# EAGLE board registers_manual2 (EAGLE 9.5.2)
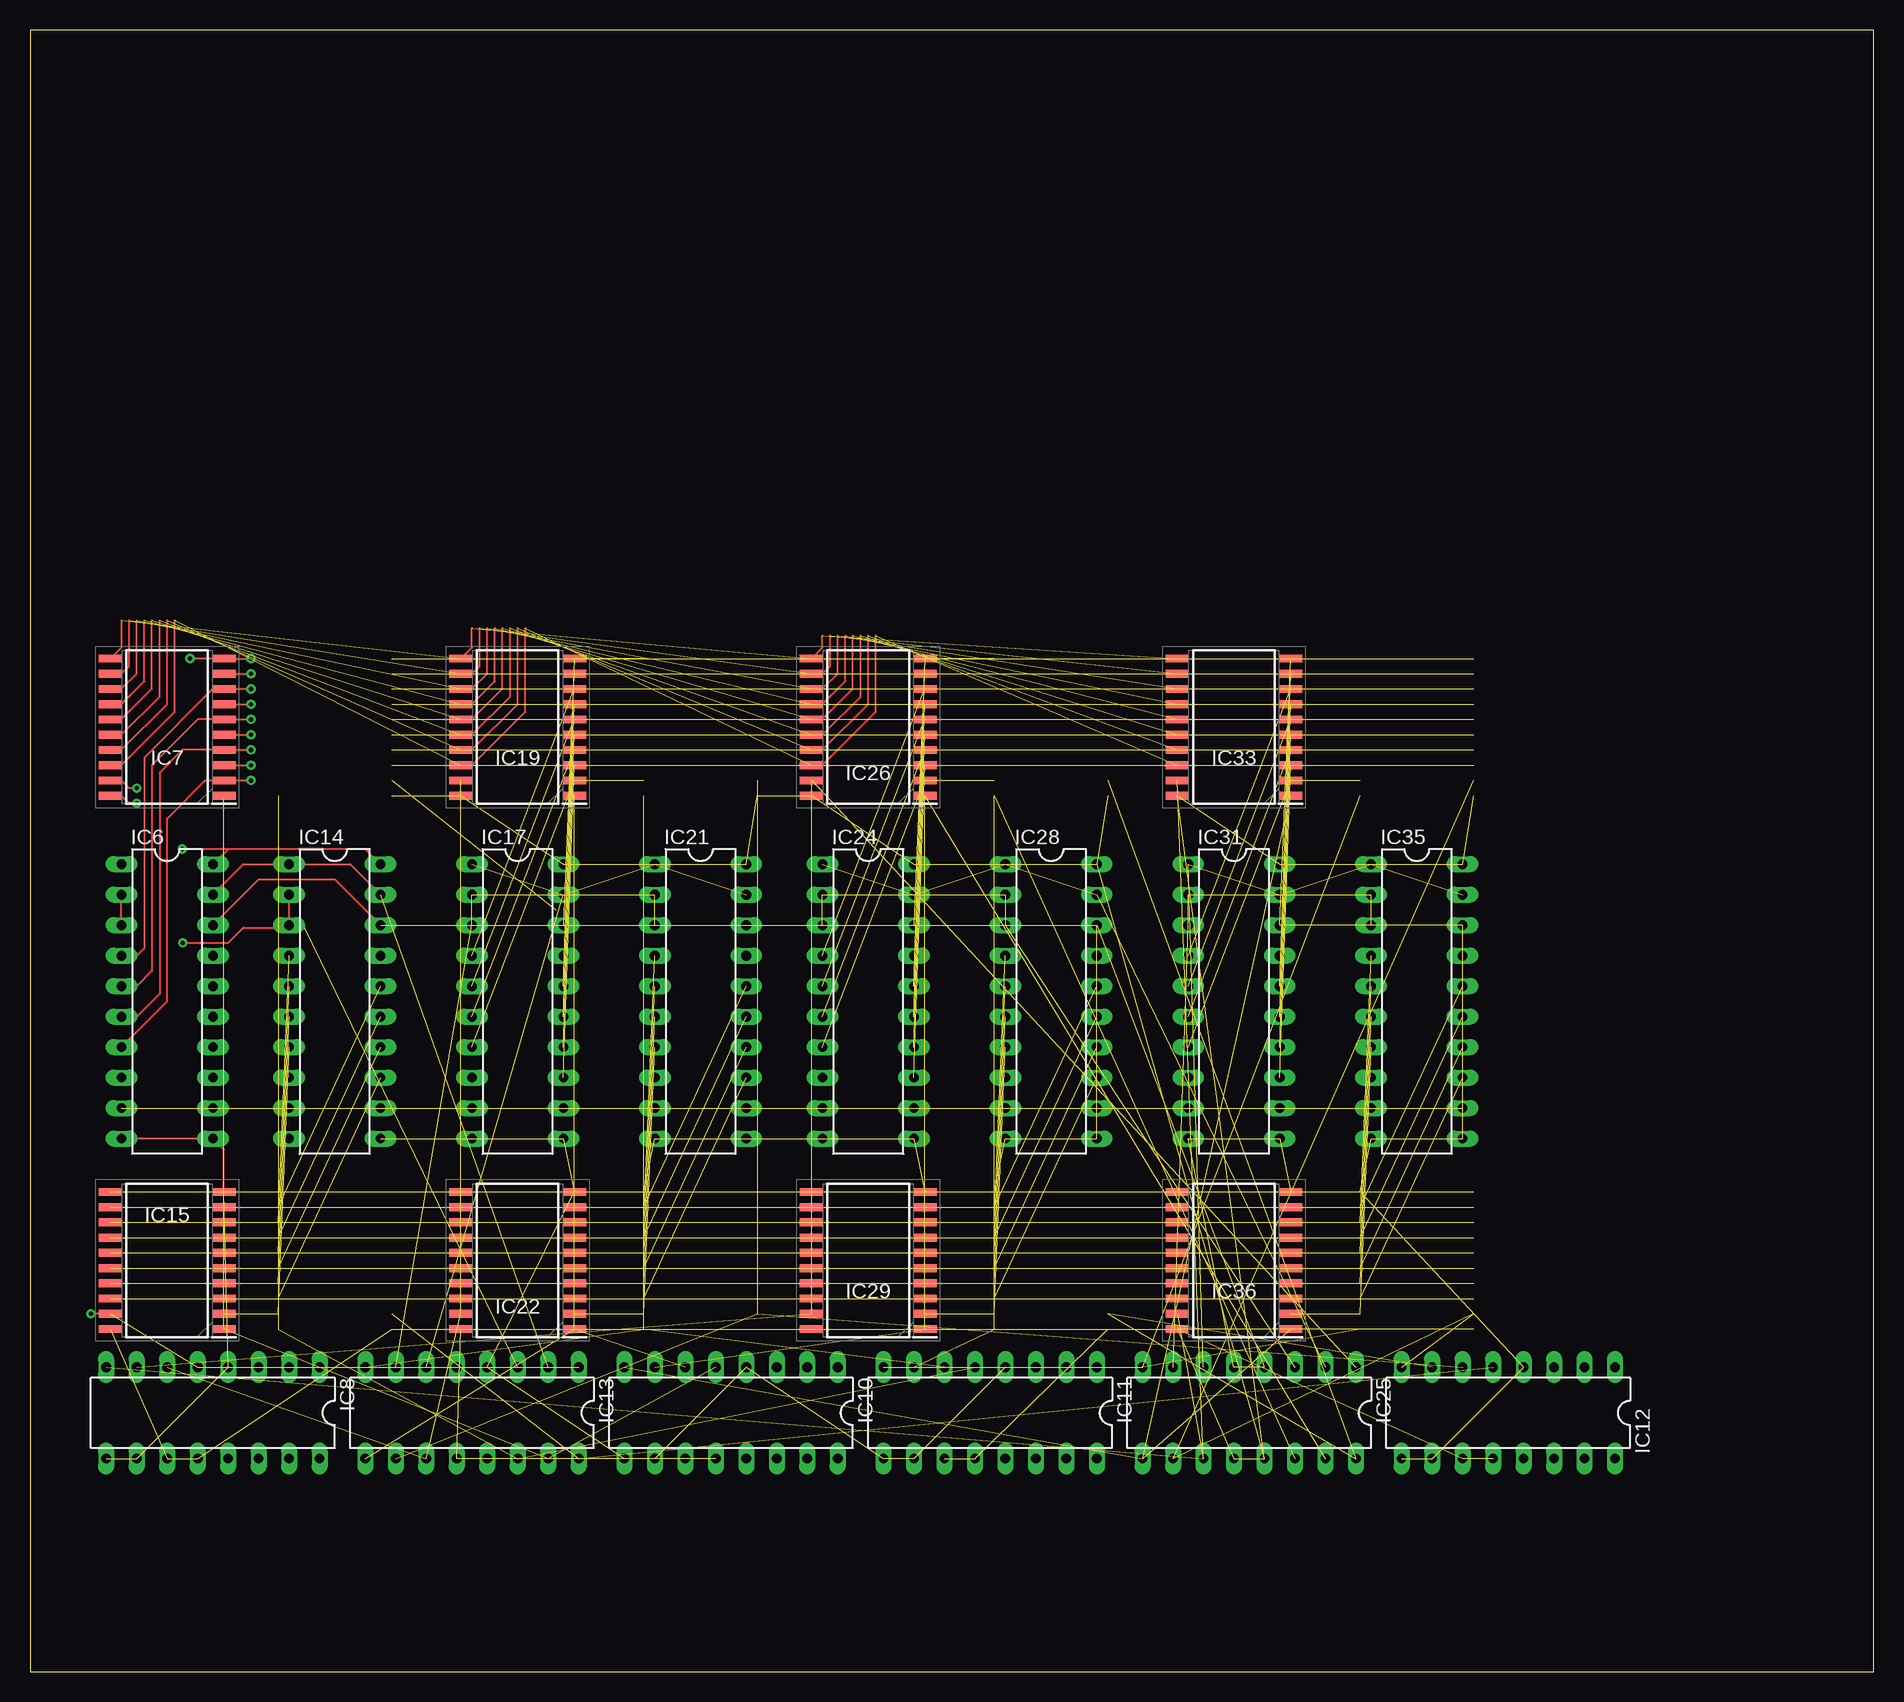
[diagram p0: board, top side]
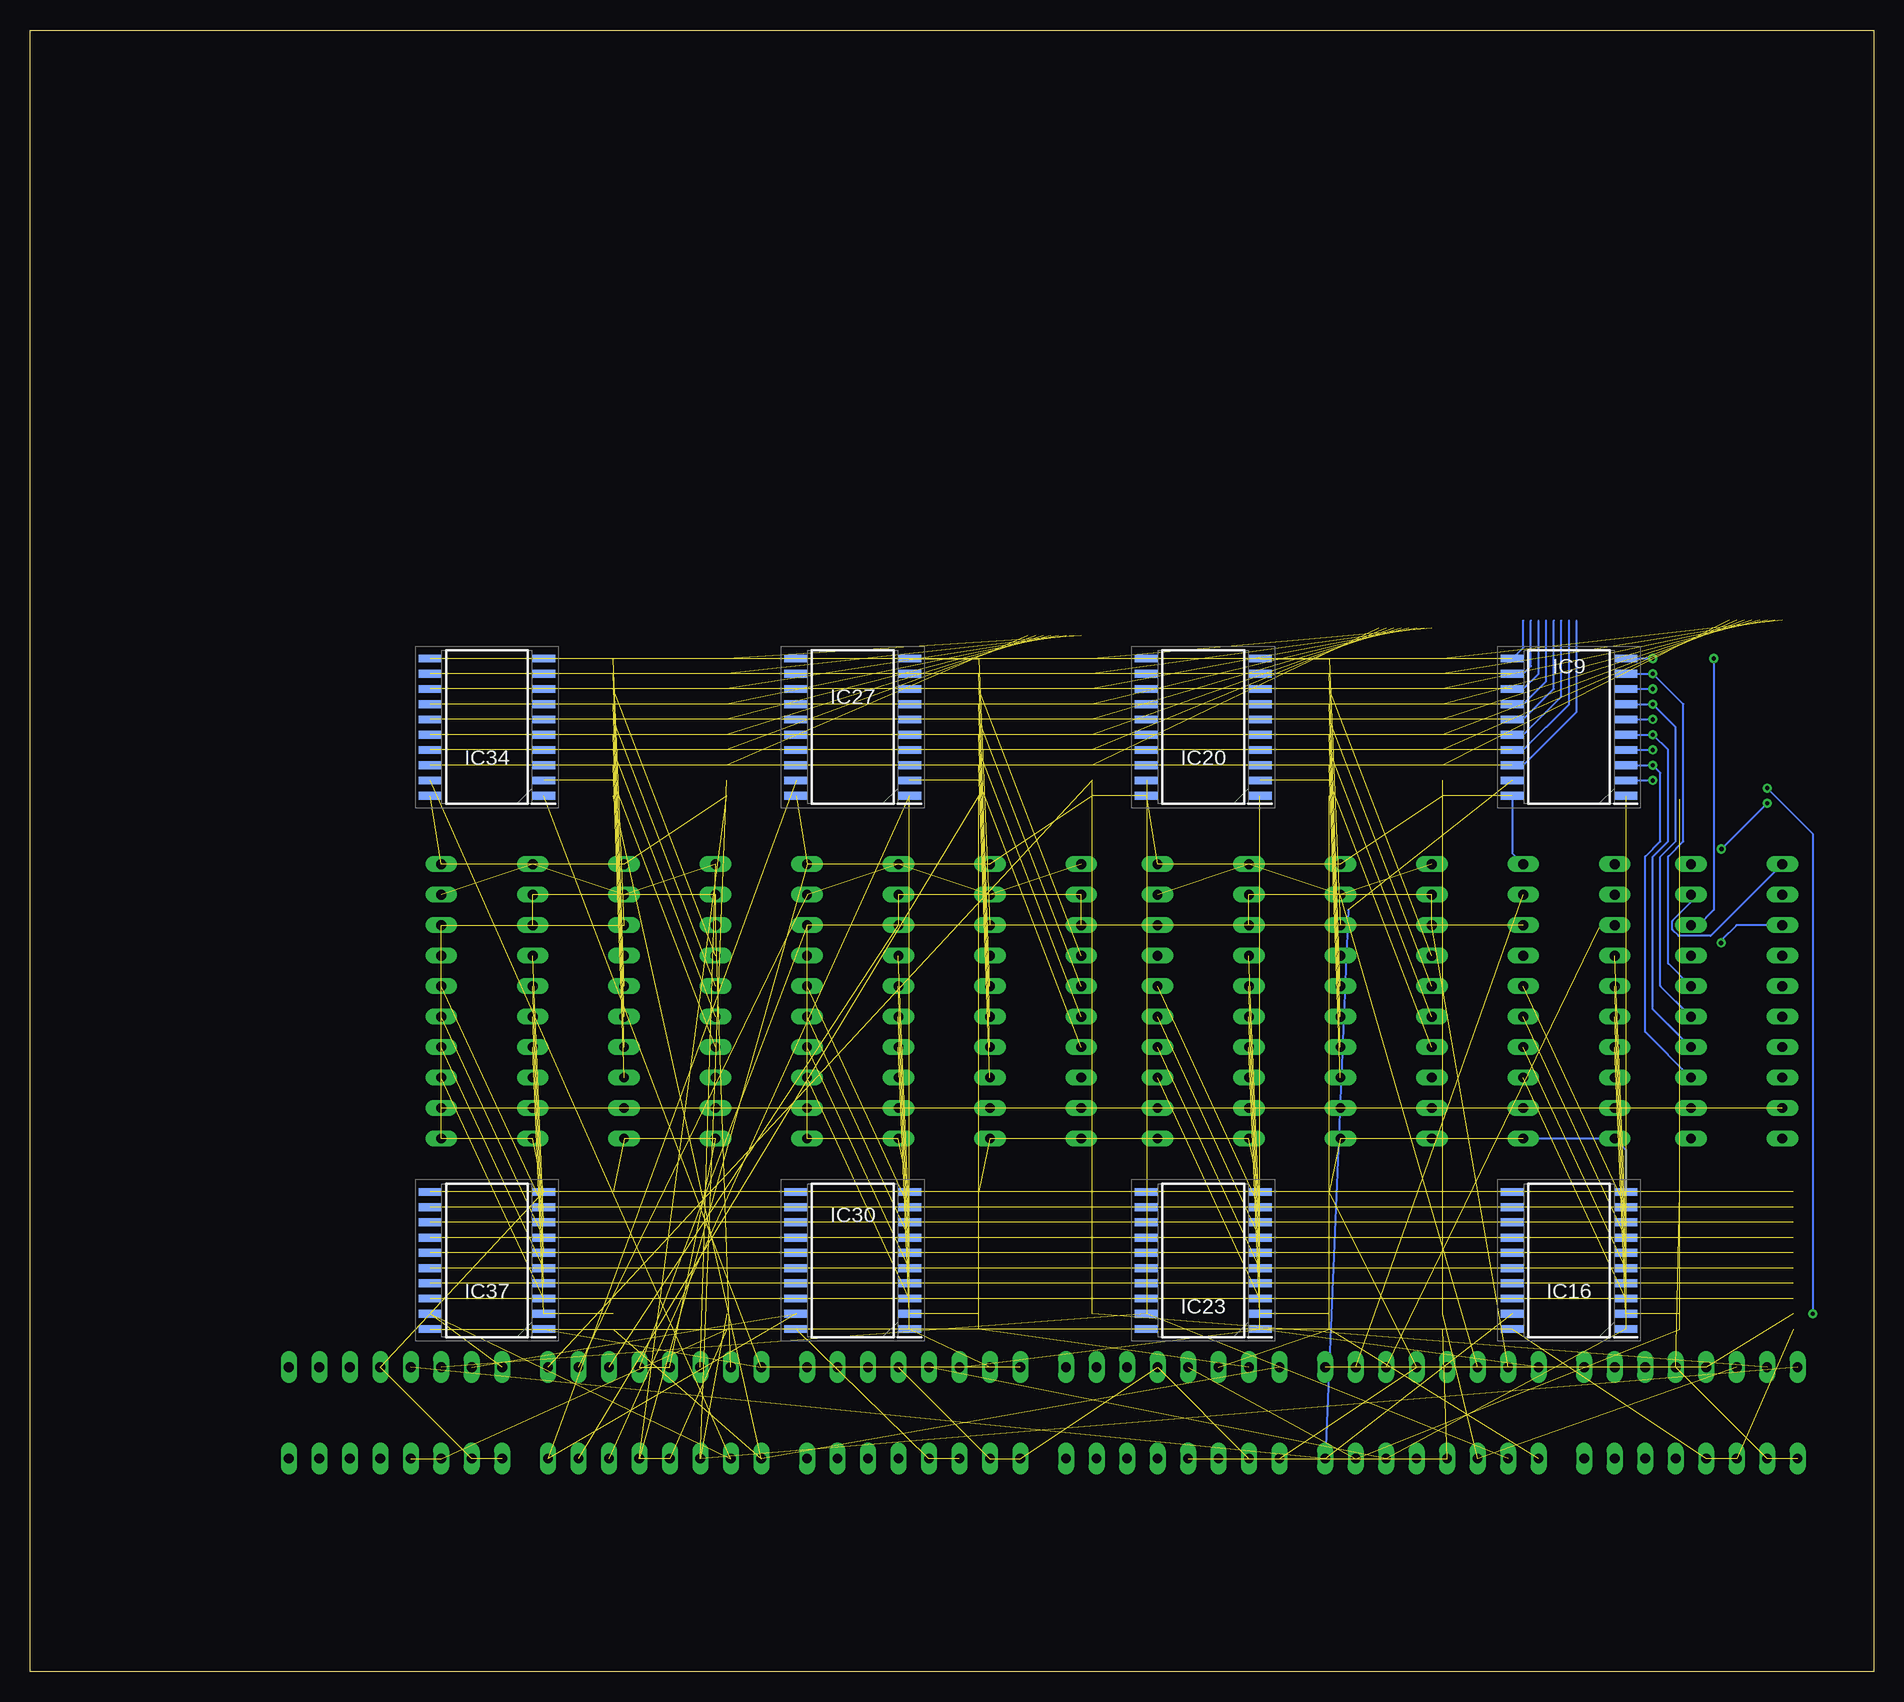
[diagram p1: board, bottom side, seen from below]

Size 153.65 x 136.83 mm. Coordinates in mm from the lower left corner, seen from the top.
Outline: 0,0 153.65,0 153.65,136.83 0,136.83 0,0
Copper layers (1*16): Top 0.035mm / dielectric 1.5mm / Bottom 0.035mm
Design rules "default *": minimum track width 6mil, minimum drill 0.35mm, track to track 6mil, track to pad 6mil, pad to pad 6mil, via to via 6mil, smd to smd 6mil, copper to edge 40mil, drill to drill 6mil, minimum pad ring 10mil, minimum via ring 8mil, stop-mask expansion 4mil, vias tented up to drill 0mil, thermal gap 10mil

## Footprints (pad centres in the part's own frame; a part is rotated, then mirrored left to right if it is on the bottom)
DIL20 = drill 0.813 long: 1 -11.43,-3.81; 2 -8.89,-3.81; 3 -6.35,-3.81; 4 -3.81,-3.81; 5 -1.27,-3.81; 6 1.27,-3.81; 7 3.81,-3.81; 8 6.35,-3.81; 9 8.89,-3.81; 10 11.43,-3.81; 11 11.43,3.81; 12 8.89,3.81; 13 6.35,3.81; 14 3.81,3.81; 15 1.27,3.81; 16 -1.27,3.81; 17 -3.81,3.81; 18 -6.35,3.81; 19 -8.89,3.81; 20 -11.43,3.81
SOIC127P1030X265-20N = smd 1.95 x 0.65: 1 -4.725,5.715; 2 -4.725,4.445; 3 -4.725,3.175; 4 -4.725,1.905; 5 -4.725,0.635; 6 -4.725,-0.635; 7 -4.725,-1.905; 8 -4.725,-3.175; 9 -4.725,-4.445; 10 -4.725,-5.715; 11 4.725,-5.715; 12 4.725,-4.445; 13 4.725,-3.175; 14 4.725,-1.905; 15 4.725,-0.635; 16 4.725,0.635; 17 4.725,1.905; 18 4.725,3.175; 19 4.725,4.445; 20 4.725,5.715
DIL16 = drill 0.813 long: 1 -8.89,-3.81; 2 -6.35,-3.81; 3 -3.81,-3.81; 4 -1.27,-3.81; 5 1.27,-3.81; 6 3.81,-3.81; 7 6.35,-3.81; 8 8.89,-3.81; 9 8.89,3.81; 10 6.35,3.81; 11 3.81,3.81; 12 1.27,3.81; 13 -1.27,3.81; 14 -3.81,3.81; 15 -6.35,3.81; 16 -8.89,3.81

## Placement (x,y rotation side)
IC6  74HCT299N  [DIL20]  11.43,55.88 270 top
IC7  SN74CBT3345DW  [SOIC127P1030X265-20N]  11.43,78.74 180 top
IC8  74AC11138  [DIL16]  15.24,21.59 180 top
IC9  SN74CBT3345DW  [SOIC127P1030X265-20N]  25.4,78.74 180 bottom
IC10  74AC11238  [DIL16]  58.42,21.59 180 top
IC11  74AC11238  [DIL16]  80.01,21.59 180 top
IC12  74AC11138  [DIL16]  123.19,21.59 180 top
IC13  74AC11032  [DIL16]  36.83,21.59 180 top
IC14  74HCT299N  [DIL20]  25.4,55.88 270 top
IC15  SN74CBT3345DW  [SOIC127P1030X265-20N]  11.43,34.29 180 top
IC16  SN74CBT3345DW  [SOIC127P1030X265-20N]  25.4,34.29 180 bottom
IC17  74HCT299N  [DIL20]  40.64,55.88 270 top
IC19  SN74CBT3345DW  [SOIC127P1030X265-20N]  40.64,78.74 180 top
IC20  SN74CBT3345DW  [SOIC127P1030X265-20N]  55.88,78.74 180 bottom
IC21  74HCT299N  [DIL20]  55.88,55.88 270 top
IC22  SN74CBT3345DW  [SOIC127P1030X265-20N]  40.64,34.29 180 top
IC23  SN74CBT3345DW  [SOIC127P1030X265-20N]  55.88,34.29 180 bottom
IC24  74HCT299N  [DIL20]  69.85,55.88 270 top
IC25  74AC11032  [DIL16]  101.6,21.59 180 top
IC26  SN74CBT3345DW  [SOIC127P1030X265-20N]  69.85,78.74 180 top
IC27  SN74CBT3345DW  [SOIC127P1030X265-20N]  85.09,78.74 180 bottom
IC28  74HCT299N  [DIL20]  85.09,55.88 270 top
IC29  SN74CBT3345DW  [SOIC127P1030X265-20N]  69.85,34.29 180 top
IC30  SN74CBT3345DW  [SOIC127P1030X265-20N]  85.09,34.29 180 bottom
IC31  74HCT299N  [DIL20]  100.33,55.88 270 top
IC33  SN74CBT3345DW  [SOIC127P1030X265-20N]  100.33,78.74 180 top
IC34  SN74CBT3345DW  [SOIC127P1030X265-20N]  115.57,78.74 180 bottom
IC35  74HCT299N  [DIL20]  115.57,55.88 270 top
IC36  SN74CBT3345DW  [SOIC127P1030X265-20N]  100.33,34.29 180 top
IC37  SN74CBT3345DW  [SOIC127P1030X265-20N]  115.57,34.29 180 bottom

## Library data of the parts
IC6 IC14 IC17 IC21 IC24 IC28 IC31 IC35 = 74xx-eu
IC7 IC9 IC15 IC16 IC19 IC20 IC22 IC23 IC26 IC27 IC29 IC30 IC33 IC34 IC36 IC37 = SamacSys_Parts; DESCRIPTION: Texas Instruments SN74CBT3345DW, Bus Switch, 8 x 1:1, 4.5 5.5 V, 20-Pin SOIC; HEIGHT: 2.65mm; MANUFACTURER_NAME: Texas Instruments; MANUFACTURER_PART_NUMBER: SN74CBT3345DW
IC8 IC10-IC13 IC25 = 74ac-logic

## Nets
BUSA_BIT0: IC7.18 IC19.18 IC26.18 IC33.18
BUSA_BIT1: IC7.17 IC19.17 IC26.17 IC33.17
BUSA_BIT2: IC7.16 IC19.16 IC26.16 IC33.16
BUSA_BIT3: IC7.15 IC19.15 IC26.15 IC33.15
BUSA_BIT4: IC7.14 IC19.14 IC26.14 IC33.14
BUSA_BIT5: IC7.13 IC19.13 IC26.13 IC33.13
BUSA_BIT6: IC7.12 IC19.12 IC26.12 IC33.12
BUSA_BIT7: IC7.11 IC19.11 IC26.11 IC33.11
BUSA_BIT8: IC15.18 IC22.18 IC29.18 IC36.18
BUSA_BIT9: IC15.17 IC22.17 IC29.17 IC36.17
BUSA_BIT10: IC15.16 IC22.16 IC29.16 IC36.16
BUSA_BIT11: IC15.15 IC22.15 IC29.15 IC36.15
BUSA_BIT12: IC15.14 IC22.14 IC29.14 IC36.14
BUSA_BIT13: IC15.13 IC22.13 IC29.13 IC36.13
BUSA_BIT14: IC15.12 IC22.12 IC29.12 IC36.12
BUSA_BIT15: IC15.11 IC22.11 IC29.11 IC36.11
BUSA_REGIN0: IC8.15
BUSA_REGIN1: IC8.14
BUSA_REGIN2: IC8.13
BUSA_REGOUT0: IC10.15
BUSA_REGOUT1: IC10.14
BUSA_REGOUT2: IC10.13
BUSB_BIT0: IC9.18 IC20.18 IC27.18 IC34.18
BUSB_BIT1: IC9.17 IC20.17 IC27.17 IC34.17
BUSB_BIT2: IC9.16 IC20.16 IC27.16 IC34.16
BUSB_BIT3: IC9.15 IC20.15 IC27.15 IC34.15
BUSB_BIT4: IC9.14 IC20.14 IC27.14 IC34.14
BUSB_BIT5: IC9.13 IC20.13 IC27.13 IC34.13
BUSB_BIT6: IC9.12 IC20.12 IC27.12 IC34.12
BUSB_BIT7: IC9.11 IC20.11 IC27.11 IC34.11
BUSB_BIT8: IC16.18 IC23.18 IC30.18 IC37.18
BUSB_BIT9: IC16.17 IC23.17 IC30.17 IC37.17
BUSB_BIT10: IC16.16 IC23.16 IC30.16 IC37.16
BUSB_BIT11: IC16.15 IC23.15 IC30.15 IC37.15
BUSB_BIT12: IC16.14 IC23.14 IC30.14 IC37.14
BUSB_BIT13: IC16.13 IC23.13 IC30.13 IC37.13
BUSB_BIT14: IC16.12 IC23.12 IC30.12 IC37.12
BUSB_BIT15: IC16.11 IC23.11 IC30.11 IC37.11
BUSB_REGIN0: IC12.15
BUSB_REGIN1: IC12.14
BUSB_REGIN2: IC12.13
BUSB_REGOUT0: IC11.15
BUSB_REGOUT1: IC11.14
BUSB_REGOUT2: IC11.13
CLK: IC6.12 IC14.12 IC17.12 IC21.12 IC24.12 IC28.12 IC31.12 IC35.12
GND: IC6.10 IC6.11 IC6.18 IC7.10 IC8.4 IC8.9 IC8.10 IC9.10 IC10.4 IC10.9 IC10.10 IC11.4 IC11.9 IC11.10 IC12.4 IC12.9 IC12.10 IC13.4 IC13.5 IC14.10 IC14.11 IC14.18 IC15.10 IC16.10 IC17.10 IC17.11 IC17.18 IC19.10 IC20.10 IC21.10 IC21.11 IC21.18 IC22.10 IC23.10 IC24.10 IC24.11 IC24.18 IC25.4 IC25.5 IC26.10 IC27.10 IC28.10 IC28.11 IC28.18 IC29.10 IC30.10 IC31.10 IC31.11 IC31.18 IC33.10 IC34.10 IC35.10 IC35.11 IC35.18 IC36.10 IC37.10
N$8: IC6.7 IC7.2 IC9.2
N$10: IC7.19 IC8.5 IC13.1 IC15.19
N$18: IC6.13 IC7.3 IC9.3
N$19: IC6.2 IC6.3 IC13.3 IC14.2 IC14.3
N$20: IC6.6 IC7.4 IC9.4
N$21: IC6.1 IC6.19 IC13.2 IC14.1 IC14.19
N$22: IC14.7 IC15.2 IC16.2
N$23: IC14.13 IC15.3 IC16.3
N$24: IC14.6 IC15.4 IC16.4
N$25: IC8.7 IC25.1 IC26.19 IC29.19
N$26: IC6.14 IC7.5 IC9.5
N$27: IC6.5 IC7.6 IC9.6
N$28: IC14.14 IC15.5 IC16.5
N$29: IC14.5 IC15.6 IC16.6
N$30: IC14.15 IC15.7 IC16.7
N$31: IC14.4 IC15.8 IC16.8
N$32: IC9.1 IC11.5 IC13.14 IC16.1
N$33: IC9.19 IC12.5 IC13.16 IC16.19
N$34: IC7.1 IC10.5 IC13.15 IC15.1
N$35: IC14.16 IC15.9 IC16.9
N$41: IC6.15 IC7.7 IC9.7
N$43: IC6.4 IC7.8 IC9.8
N$44: IC13.6 IC17.1 IC17.19 IC21.1 IC21.19
N$45: IC17.7 IC19.2 IC20.2
N$46: IC17.13 IC19.3 IC20.3
N$47: IC6.16 IC7.9 IC9.9
N$48: IC17.6 IC19.4 IC20.4
N$49: IC17.14 IC19.5 IC20.5
N$50: IC17.5 IC19.6 IC20.6
N$51: IC17.15 IC19.7 IC20.7
N$52: IC17.4 IC19.8 IC20.8
N$53: IC17.16 IC19.9 IC20.9
N$54: IC13.7 IC17.2 IC17.3 IC21.2 IC21.3
N$56: IC21.7 IC22.2 IC23.2
N$57: IC21.13 IC22.3 IC23.3
N$58: IC21.6 IC22.4 IC23.4
N$59: IC21.14 IC22.5 IC23.5
N$60: IC21.5 IC22.6 IC23.6
N$61: IC21.15 IC22.7 IC23.7
N$62: IC21.4 IC22.8 IC23.8
N$63: IC21.16 IC22.9 IC23.9
N$69: IC24.1 IC24.19 IC25.2 IC28.1 IC28.19
N$70: IC24.7 IC26.2 IC27.2
N$71: IC24.13 IC26.3 IC27.3
N$72: IC24.6 IC26.4 IC27.4
N$73: IC24.14 IC26.5 IC27.5
N$74: IC24.5 IC26.6 IC27.6
N$75: IC24.15 IC26.7 IC27.7
N$76: IC24.4 IC26.8 IC27.8
N$77: IC24.16 IC26.9 IC27.9
N$78: IC24.2 IC24.3 IC25.3 IC28.2 IC28.3
N$80: IC28.7 IC29.2 IC30.2
N$81: IC28.13 IC29.3 IC30.3
N$82: IC28.6 IC29.4 IC30.4
N$83: IC28.14 IC29.5 IC30.5
N$84: IC28.5 IC29.6 IC30.6
N$85: IC28.15 IC29.7 IC30.7
N$86: IC28.4 IC29.8 IC30.8
N$87: IC28.16 IC29.9 IC30.9
N$93: IC25.6 IC31.1 IC31.19 IC35.1 IC35.19
N$94: IC31.7 IC33.2 IC34.2
N$95: IC31.13 IC33.3 IC34.3
N$96: IC31.6 IC33.4 IC34.4
N$97: IC31.14 IC33.5 IC34.5
N$98: IC31.5 IC33.6 IC34.6
N$99: IC31.15 IC33.7 IC34.7
N$100: IC31.4 IC33.8 IC34.8
N$101: IC31.16 IC33.9 IC34.9
N$102: IC25.7 IC31.2 IC31.3 IC35.2 IC35.3
N$104: IC35.7 IC36.2 IC37.2
N$105: IC35.13 IC36.3 IC37.3
N$106: IC35.6 IC36.4 IC37.4
N$107: IC35.14 IC36.5 IC37.5
N$108: IC35.5 IC36.6 IC37.6
N$109: IC35.15 IC36.7 IC37.7
N$110: IC35.4 IC36.8 IC37.8
N$111: IC35.16 IC36.9 IC37.9
N$112: IC8.6 IC13.11 IC19.19 IC22.19
N$113: IC10.6 IC13.9 IC19.1 IC22.1
N$114: IC12.6 IC13.10 IC20.19 IC23.19
N$115: IC11.6 IC13.8 IC20.1 IC23.1
N$117: IC10.7 IC25.15 IC26.1 IC29.1
N$118: IC12.7 IC25.16 IC27.19 IC30.19
N$119: IC11.7 IC25.14 IC27.1 IC30.1
N$120: IC11.8 IC25.8 IC34.1 IC37.1
N$121: IC12.8 IC25.10 IC34.19 IC37.19
N$122: IC8.8 IC25.11 IC33.19 IC36.19
N$123: IC10.8 IC25.9 IC33.1 IC36.1
STARTUP: IC6.9 IC14.9 IC17.9 IC21.9 IC24.9 IC28.9 IC31.9 IC35.9
VCC: IC6.20 IC7.20 IC8.11 IC8.12 IC9.20 IC10.11 IC10.12 IC11.11 IC11.12 IC12.11 IC12.12 IC13.12 IC13.13 IC14.20 IC15.20 IC16.20 IC17.20 IC19.20 IC20.20 IC21.20 IC22.20 IC23.20 IC24.20 IC25.12 IC25.13 IC26.20 IC27.20 IC28.20 IC29.20 IC30.20 IC31.20 IC33.20 IC34.20 IC35.20 IC36.20 IC37.20

## Tracks (layer width: path | path; a pad name or v marks a point on that pad's centre or on a via)
BUSA_BIT0  (3 unrouted)
  Top 0.152: IC7.18 7.62,75.56 12.06,80.01 12.06,87.63 | IC19.18 36.83,75.56 41.27,80.01 41.27,87 | IC26.18 66.04,75.56 70.48,80.01 70.48,86.36
BUSA_BIT1  (3 unrouted)
  Top 0.152: IC7.17 7.62,76.83 11.43,80.64 11.43,87.63 | IC19.17 36.83,76.83 40.64,80.64 40.64,87 | IC26.17 66.04,76.83 69.85,80.64 69.85,86.36
BUSA_BIT2  (3 unrouted)
  Top 0.152: IC7.16 7.62,78.11 10.79,81.28 10.79,87.63 | IC19.16 36.83,78.11 40.01,81.28 40.01,87 | IC26.16 66.04,78.11 69.22,81.28 69.22,86.36
BUSA_BIT3  (3 unrouted)
  Top 0.152: IC7.15 7.62,79.38 10.16,81.92 10.16,87.63 | IC19.15 36.83,79.38 39.37,81.92 39.37,87 | IC26.15 66.04,79.38 68.58,81.92 68.58,86.36
BUSA_BIT4  (3 unrouted)
  Top 0.152: IC7.14 7.62,80.64 9.53,82.55 9.53,87.63 | IC19.14 36.83,80.64 38.73,82.55 38.73,87 | IC26.14 66.04,80.64 67.94,82.55 67.94,86.36
BUSA_BIT5  (3 unrouted)
  Top 0.152: IC7.13 7.62,81.92 8.89,83.19 8.89,87.63 | IC19.13 36.83,81.92 38.1,83.19 38.1,87 | IC26.13 66.04,81.92 67.31,83.19 67.31,86.36
BUSA_BIT6  (3 unrouted)
  Top 0.152: IC7.12 7.62,83.19 8.26,83.82 8.26,87.63 | IC19.12 36.83,83.19 37.47,83.82 37.47,87 | IC26.12 66.04,83.19 66.67,83.82 66.67,86.36
BUSA_BIT7  (3 unrouted)
  Top 0.152: 7.62,87.63 7.62,85.37 IC7.11 | IC19.11 36.83,85.37 36.83,87 | IC26.11 66.04,85.37 66.04,86.36
BUSA_BIT8  (3 unrouted)
BUSA_BIT9  (3 unrouted)
BUSA_BIT10  (3 unrouted)
BUSA_BIT11  (3 unrouted)
BUSA_BIT12  (3 unrouted)
BUSA_BIT13  (3 unrouted)
BUSA_BIT14  (3 unrouted)
BUSA_BIT15  (3 unrouted)
BUSB_BIT0  (3 unrouted)
  Bottom 0.152: IC9.18 29.21,75.56 24.77,80.01 24.77,87.63
BUSB_BIT1  (3 unrouted)
  Bottom 0.152: IC9.17 29.21,76.83 25.4,80.64 25.4,87.63
BUSB_BIT2  (3 unrouted)
  Bottom 0.152: IC9.16 29.21,78.11 26.04,81.28 26.04,87.63
BUSB_BIT3  (3 unrouted)
  Bottom 0.152: IC9.15 29.21,79.38 26.67,81.92 26.67,87.63
BUSB_BIT4  (3 unrouted)
  Bottom 0.152: IC9.14 29.21,80.64 27.3,82.55 27.3,87.63
BUSB_BIT5  (3 unrouted)
  Bottom 0.152: IC9.13 29.21,81.92 27.94,83.19 27.94,87.63
BUSB_BIT6  (3 unrouted)
  Bottom 0.152: IC9.12 29.21,83.19 28.57,83.82 28.57,87.63
BUSB_BIT7  (3 unrouted)
  Bottom 0.152: IC9.11 29.21,85.37 29.21,87.63
BUSB_BIT8  (3 unrouted)
BUSB_BIT9  (3 unrouted)
BUSB_BIT10  (3 unrouted)
BUSB_BIT11  (3 unrouted)
BUSB_BIT12  (3 unrouted)
BUSB_BIT13  (3 unrouted)
BUSB_BIT14  (3 unrouted)
BUSB_BIT15  (3 unrouted)
CLK  (7 unrouted)
GND  (via drill 0.35)  (48 unrouted)
  Top 0.152: v18.41,84.45 IC7.10 v13.34,84.45 | IC15.10 16.16,43.53 IC6.11 IC6.10 | IC6.18 19.05,66.04 25.4,66.04 IC14.18
  Bottom 0.152: v18.41,84.45 IC9.10 | v13.34,84.45 13.34,63.5 14.61,62.23 IC6.18 | IC16.10 20.68,43.53 IC14.10 IC14.11
N$8  (via drill 0.35)
  Top 0.152: v18.41,74.3 IC7.2 14.61,74.3 11.43,71.12 11.43,55.88 IC6.7
  Bottom 0.152: IC9.2 v18.41,74.3
N$10  (via drill 0.35)  (2 unrouted)
  Top 0.152: IC7.19 7.62,74.3 8.26,73.66 v8.89,73.66 | IC15.19 v5.08,29.84
  Bottom 0.152: v5.08,29.84 5.08,69.85 v8.89,73.66
N$18  (via drill 0.35)
  Top 0.152: IC7.3 v18.41,75.56
  Bottom 0.152: IC6.13 19.05,53.34 19.05,67.94 17.78,69.22 17.78,74.93 v18.41,75.56 IC9.3
N$19  (via drill 0.35)  (1 unrouted)
  Top 0.152: IC6.3 IC6.2 | v12.73,60.75 16.51,60.75 17.78,62.02 21.59,62.02 | 21.59,62.02 22.89,62.02 | 21.59,62.02 IC14.3 IC14.2
  Bottom 0.152: IC6.3 11.43,62.23 12.7,60.96 12.73,60.96 v12.73,60.75
N$20  (via drill 0.35)
  Top 0.152: v18.41,76.83 IC7.4 12.7,76.83 10.79,74.93 10.79,56.52 8.89,54.61 IC6.6
  Bottom 0.152: IC9.4 v18.41,76.83
N$21  (1 unrouted)
  Top 0.152: IC14.19 26.67,67.31 IC14.1 17.78,67.31 IC6.19
  Bottom 0.152: IC6.1 13.59,61.34 16.27,61.34 16.79,61.86 16.79,62.6 15.24,64.15 IC6.19
N$22  (2 unrouted)
N$23  (2 unrouted)
N$24  (2 unrouted)
N$25  (3 unrouted)
N$26  (via drill 0.35)
  Top 0.152: IC7.5 v18.41,78.11
  Bottom 0.152: 17.14,53.98 IC6.14 18.41,55.24 18.41,67.94 17.14,69.22 17.14,76.83 v18.41,78.11 IC9.5
N$27  (via drill 0.35)
  Top 0.152: v18.41,79.38 IC7.6 13.97,79.38 10.16,75.56 10.16,58.42 8.89,57.15 IC6.5
  Bottom 0.152: IC9.6 v18.41,79.38
N$28  (2 unrouted)
N$29  (2 unrouted)
N$30  (2 unrouted)
N$31  (2 unrouted)
N$32  (3 unrouted)
N$33  (3 unrouted)
  Bottom 0.152: 43.81,63.5 IC13.16
N$34  (3 unrouted)
  Top 0.152: 16.16,72.75 IC7.1
N$35  (2 unrouted)
N$41  (via drill 0.35)
  Top 0.152: v18.41,80.64 IC7.7 15.24,80.64
  Bottom 0.152: 16.51,55.88 IC6.15 17.78,57.15 17.78,67.94 16.51,69.22 16.51,78.74 v18.41,80.64 IC9.7
N$43  (via drill 0.35)
  Top 0.152: v18.41,81.92 IC7.8 15.24,81.92 9.53,76.2 9.53,60.33 8.89,59.69 IC6.4
  Bottom 0.152: IC9.8 v18.41,81.92
N$44  (4 unrouted)
N$45  (2 unrouted)
N$46  (2 unrouted)
N$47  (via drill 0.35)
  Top 0.152: v18.41,83.19 IC7.9 15.24,83.19
  Bottom 0.152: 13.97,57.15 IC6.16 | 15.88,57.15 IC6.16 | IC9.9 v18.41,83.19 15.88,80.64 15.88,69.22 17.14,67.94 17.14,59.05 IC6.16
N$48  (2 unrouted)
N$49  (2 unrouted)
N$50  (2 unrouted)
N$51  (2 unrouted)
N$52  (2 unrouted)
N$53  (2 unrouted)
N$54  (4 unrouted)
N$56  (2 unrouted)
N$57  (2 unrouted)
N$58  (2 unrouted)
N$59  (2 unrouted)
N$60  (2 unrouted)
N$61  (2 unrouted)
N$62  (2 unrouted)
N$63  (2 unrouted)
N$69  (4 unrouted)
N$70  (2 unrouted)
N$71  (2 unrouted)
N$72  (2 unrouted)
N$73  (2 unrouted)
N$74  (2 unrouted)
N$75  (2 unrouted)
N$76  (2 unrouted)
N$77  (2 unrouted)
N$78  (4 unrouted)
N$80  (2 unrouted)
N$81  (2 unrouted)
N$82  (2 unrouted)
N$83  (2 unrouted)
N$84  (2 unrouted)
N$85  (2 unrouted)
N$86  (2 unrouted)
N$87  (2 unrouted)
N$93  (4 unrouted)
N$94  (2 unrouted)
N$95  (2 unrouted)
N$96  (2 unrouted)
N$97  (2 unrouted)
N$98  (2 unrouted)
N$99  (2 unrouted)
N$100  (2 unrouted)
N$101  (2 unrouted)
N$102  (4 unrouted)
N$104  (2 unrouted)
N$105  (2 unrouted)
N$106  (2 unrouted)
N$107  (2 unrouted)
N$108  (2 unrouted)
N$109  (2 unrouted)
N$110  (2 unrouted)
N$111  (2 unrouted)
N$112  (3 unrouted)
N$113  (3 unrouted)
N$114  (3 unrouted)
N$115  (3 unrouted)
N$117  (3 unrouted)
N$118  (3 unrouted)
N$119  (3 unrouted)
N$120  (3 unrouted)
N$121  (3 unrouted)
N$122  (3 unrouted)
N$123  (3 unrouted)
STARTUP  (7 unrouted)
VCC  (via drill 0.35)  (32 unrouted)
  Top 0.152: IC7.20 7.62,73.03 8.26,72.39 v8.89,72.39 | 13.97,67.31 IC6.20 16.51,68.58 | IC14.20 27.94,68.58 16.51,68.58 | 16.51,68.58 v12.7,68.58
  Bottom 0.152: IC9.20 30.12,68.22 IC14.20 | v12.7,68.58 v8.89,72.39